# Altium PCB BMS_Slave_R2.PcbDoc
Units mil, origin at the board's own origin, x right, y up, seen from the top; angles counter-clockwise.
Board outline 5120 x 2360 mil, 2 copper layers (Top Layer, Bottom Layer); 120 components, 85 nets, 302 pads, 218 vias.
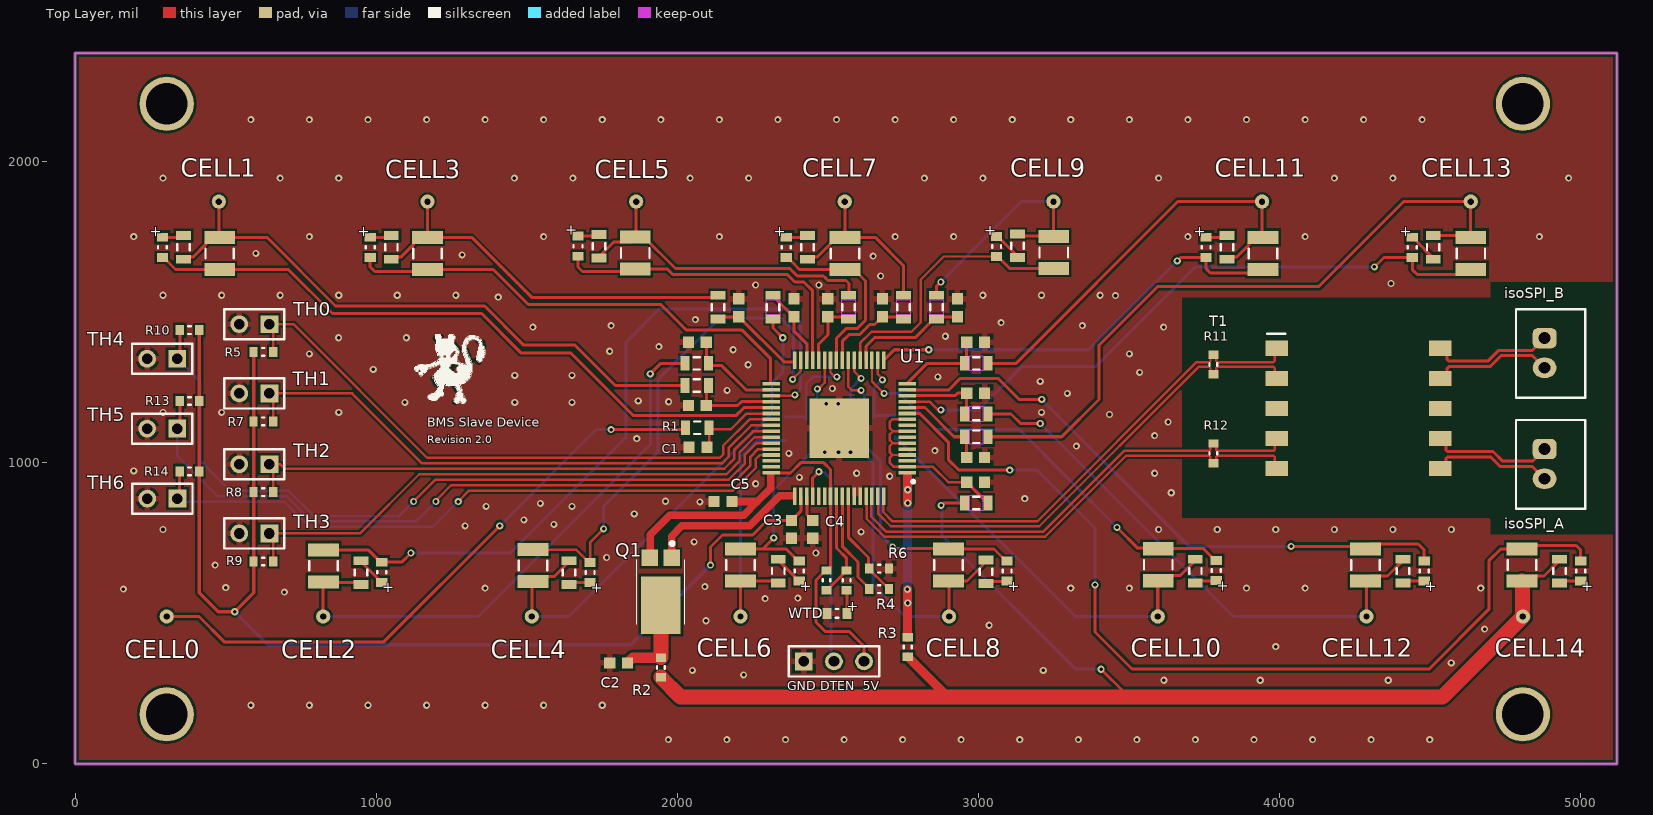
[diagram p0: Top Layer view]
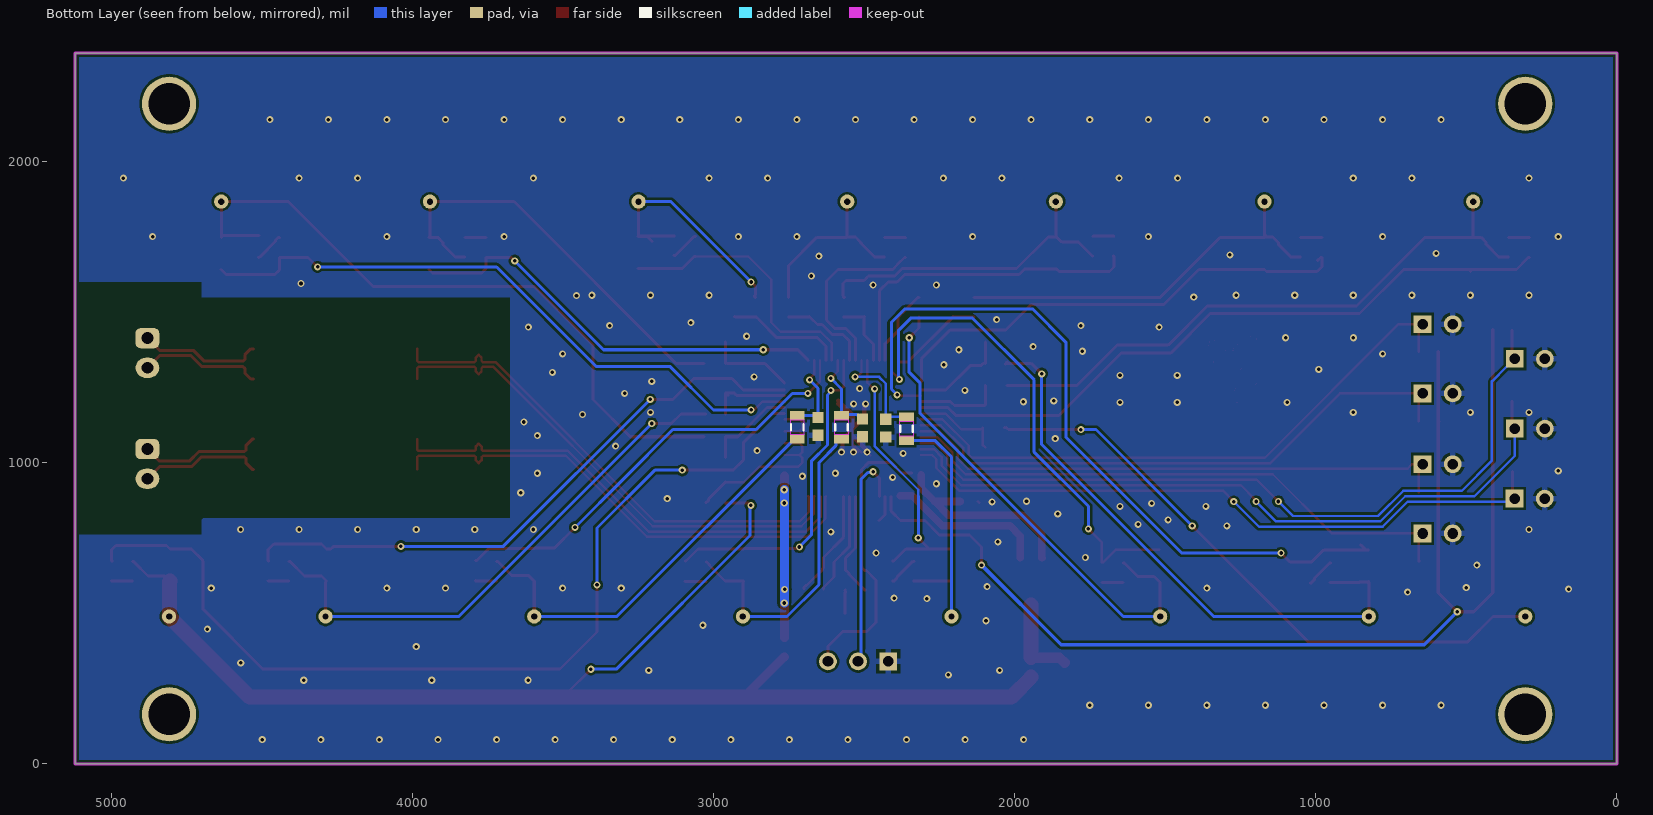
[diagram p1: Bottom Layer view, seen from below]
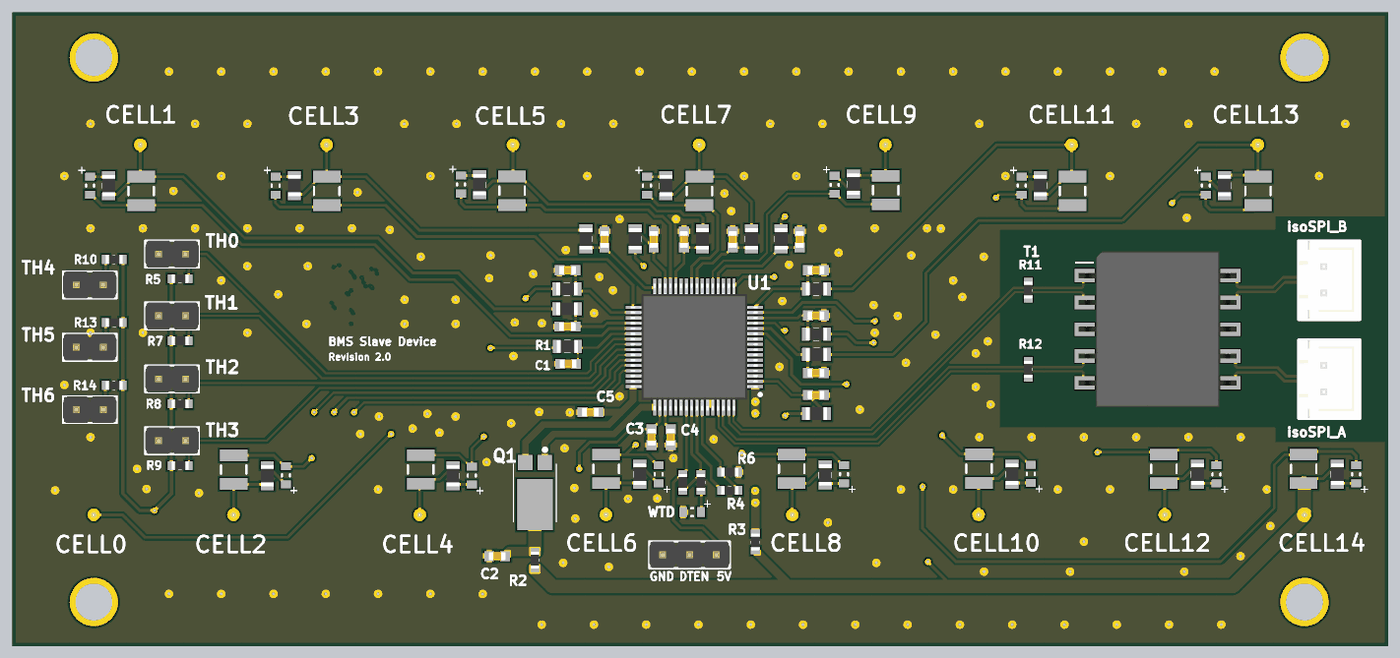
[diagram p2: 3D render of the assembled board from above, using the file's embedded part models]
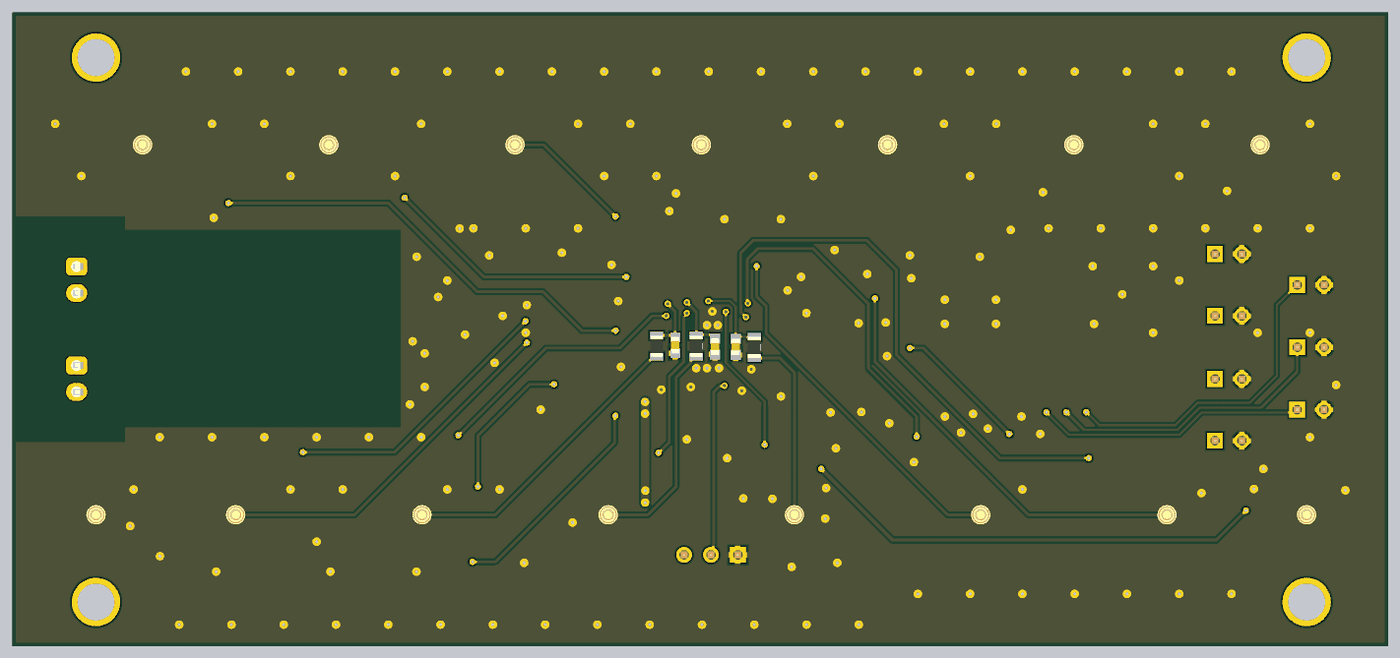
[diagram p3: 3D render of the assembled board from below, using the file's embedded part models]

## Layer stack, top to bottom
Top Solder: solder mask 0.4, Solder Resist, Dk 3.5
Top Layer: signal copper 1.4
Dielectric 1: dielectric 12.6, FR-4, Dk 4.8
Bottom Layer: signal copper 1.4
Bottom Solder: solder mask 0.4, Solder Resist, Dk 3.5

## Board outline
0,0 5120,0 5120,2360 0,2360

## Design rules (kind name [scope] priority, off if disabled: settings)
BoardOutlineClearance [All] p1: gap=7.87 ignorepadtopadclearanceinfootprint=FALSE except(15.75: Arc-SplitBarrior Arc-SplitContinuation Track-SplitBarrior Track-SplitContinuation SMDPad-SplitBarrior SMDPad-SplitContinuation THPad-SplitBarrior THPad-SplitContinuation Via-SplitBarrior Via-SplitContinuation Fill-SplitBarrior Fill-SplitContinuation Poly-SplitBarrior Poly-SplitContinuation Region-SplitBarrior Region-SplitContinuation Text-SplitBarrior Text-SplitContinuation)
Clearance [All] p1: gap=7.87 ignorepadtopadclearanceinfootprint=FALSE except(3.5: Arc-Arc Arc-Track Arc-SMDPad Track-Track Track-SMDPad SMDPad-SMDPad; 5: Arc-Via Track-Via SMDPad-Via THPad-Via Via-Via; 10: Arc-Text Track-Text SMDPad-Text THPad-Text Via-Text Fill-Text Poly-Text Region-Text Text-Text)
DiffPairsRouting [All] p1: maxlimit=10 minlimit=10 mostfreqgap=10 toplayer_minwidth=15 toplayer_maxwidth=15 toplayer_prefwidth=15 bottomlayer_minwidth=15 bottomlayer_maxwidth=15 bottomlayer_prefwidth=15 maxuncoupledlength=500
HoleSize [All] p1: absolutevalues=TRUE maxlimit=248.03 minlimit=7.87 maxpercent=80.000 minpercent=20.000
MinimumAnnularRing [All] p1: minimumring=3
MinimumSolderMaskSliver [All] p1: minsoldermaskwidth=3.94
PlaneConnect [All] p1: planeconnectstyle=Relief reliefexpansion=20 reliefentries=4 reliefconductorwidth=5.1 reliefairgap=10
PolygonConnect PolygonConnect_1 [All] p1: thpad.connectstyle=Relief thpad.reliefconductorwidth=20 thpad.reliefentries=4 thpad.polygonreliefangle="90 Angle" thpad.airgapwidth=10 smdpad.connectstyle=Relief smdpad.reliefconductorwidth=20 smdpad.reliefentries=4 smdpad.polygonreliefangle="90 Angle" smdpad.airgapwidth=10 via.connectstyle=Direct via.reliefconductorwidth=20 via.reliefentries=4 via.polygonreliefangle="90 Angle" via.airgapwidth=10
RoutingCorners [All] p1: cornerstyle=Round minsetback=100 maxsetback=100
RoutingVias [All] p1: holewidth=19.68 width=39.37 viastyle="Through Hole" minholewidth=7.87 minwidth=17.72 maxholewidth=39.37 maxwidth=78.74
SilkToSilkClearance [All] p1: silktosilkclearance=3.94
SilkToSolderMaskClearance [IsPad] p1: minsilkscreentomaskgap=3.94 clearancetoexposedcopper=TRUE
SolderMaskExpansion [All] p1: expansion=4 istentingtop=FALSE
Width [All] p1: maxlimit=100 minlimit=3.5 preferedwidth=15
23 further rules are at their usual default settings.

## Classes and differential pairs
differential pair class ISOSPI_PORTA_N: ISOSPI_PORTA ISOSPI_PORTB ISOSPIA ISOSPIB
channel class "Voltage Sensing": CELL1 CELL2 CELL3 CELL4 CELL5 CELL6 CELL7 CELL8 CELL9 CELL10 CELL11 CELL12 CELL13 CELL14
component class Designator: C2 C3 C4 C5 Q1 R2 R3 R4 R5 R6 R7 R8 R9 R10 R11 R12 R13 R14 U1
component class CELL14: C5_CELL14 D2_CELL14 R15_CELL14 R16_CELL14 R17_CELL14
component class CELL13: C5_CELL13 D2_CELL13 R15_CELL13 R16_CELL13 R17_CELL13
component class CELL12: C5_CELL12 D2_CELL12 R15_CELL12 R16_CELL12 R17_CELL12
component class CELL11: C5_CELL11 D2_CELL11 R15_CELL11 R16_CELL11 R17_CELL11
component class CELL10: C5_CELL10 D2_CELL10 R15_CELL10 R16_CELL10 R17_CELL10
component class CELL9: C5_CELL9 D2_CELL9 R15_CELL9 R16_CELL9 R17_CELL9
component class CELL8: C5_CELL8 D2_CELL8 R15_CELL8 R16_CELL8 R17_CELL8
component class CELL7: C5_CELL7 D2_CELL7 R15_CELL7 R16_CELL7 R17_CELL7
component class CELL6: C5_CELL6 D2_CELL6 R15_CELL6 R16_CELL6 R17_CELL6
component class CELL5: C5_CELL5 D2_CELL5 R15_CELL5 R16_CELL5 R17_CELL5
component class CELL4: C5_CELL4 D2_CELL4 R15_CELL4 R16_CELL4 R17_CELL4
component class CELL3: C5_CELL3 D2_CELL3 R15_CELL3 R16_CELL3 R17_CELL3
component class CELL2: C5_CELL2 D2_CELL2 R15_CELL2 R16_CELL2 R17_CELL2
component class CELL1: C5_CELL1 D2_CELL1 R15_CELL1 R16_CELL1 R17_CELL1
component class BMS_Slave_R2: C1 CELL0 CELL2 CELL3 CELL4 CELL5 CELL6 CELL7 CELL8 CELL9 CELL11 CELL12 CELL13 CELL14 R1
differential pair ISOSPIB: +ISOSPIB_P -ISOSPIB_N
differential pair ISOSPIA: +ISOSPIA_P -ISOSPIA_N
differential pair ISOSPI_PORTB: +ISOSPI_PORTB_P -ISOSPI_PORTB_N
differential pair ISOSPI_PORTA: +ISOSPI_PORTA_P -ISOSPI_PORTA_N

## Components (designator, comment, footprint, x,y, rotation, side; value= is the part's Value field where it differs from the comment)
C1 "Cap" "0603 - Capacitor" 2068.47,1051 r0 top value=10nF
C2 "Cap" "0603 - Capacitor" 1804.53,335 r0 top value=10nF
C3 "Cap" "0603 - Capacitor" 2378.97,778.23 r90 top value=1uF
C4 "Cap" "0603 - Capacitor" 2450,778.23 r90 top value=1uF
C5 "Cap" "0603 - Capacitor" 2990.47,935 r180 top value=10nF
C5 "Cap" "0603 - Capacitor" 2990.47,1017 r180 top value=10nF
C5 "Cap" "0603 - Capacitor" 2990.47,1230.94 r180 top value=10nF
C5 "Cap" "0603 - Capacitor" 2990.53,1400 r180 top value=10nF
C5 "Cap" "0603 - Capacitor" 2652.93,1120.47 r90 bottom value=10nF
C5 "Cap" "0603 - Capacitor" 2930,1514.53 r270 top value=10nF
C5 "Cap" "0603 - Capacitor" 2504.93,1115.47 r90 bottom value=10nF
C5 "Cap" "0603 - Capacitor" 2680.94,1514.53 r270 top value=10nF
C5 "Cap" "0603 - Capacitor" 2428,1114.53 r90 bottom value=10nF
C5 "Cap" "0603 - Capacitor" 2499.28,1514.53 r270 top value=10nF
C5 "Cap" "0603 - Capacitor" 2386.94,1514.53 r270 top value=10nF
C5 "Cap" "0603 - Capacitor" 2203.94,1514.53 r270 top value=10nF
C5 "Cap" "0603 - Capacitor" 2066.53,1400 r0 top value=10nF
C5 "Cap" "0603 - Capacitor" 2066.11,1189.99 r0 top value=10nF
C5 "Cap" "0603 - Capacitor" 2151.53,871 r0 top value=1uF
CELL0 "POGO_PIN" POGO_PIN 304,489 r0 top locked (schematic designator J0)
CELL1 "POGO_PIN" POGO_PIN 477.23,1866.95 r0 top locked (schematic designator J1)
CELL2 "POGO_PIN" POGO_PIN 823.68,489 r0 top locked (schematic designator J2)
CELL3 "POGO_PIN" POGO_PIN 1170.14,1866.95 r0 top locked (schematic designator J3)
CELL4 "POGO_PIN" POGO_PIN 1516.6,489 r0 top locked (schematic designator J4)
CELL5 "POGO_PIN" POGO_PIN 1863.05,1866.95 r0 top locked (schematic designator J5)
CELL6 "POGO_PIN" POGO_PIN 2209.51,489 r0 top locked (schematic designator J6)
CELL7 "POGO_PIN" POGO_PIN 2555.97,1866.95 r0 top locked (schematic designator J7)
CELL8 "POGO_PIN" POGO_PIN 2902.43,489 r0 top locked (schematic designator J8)
CELL9 "POGO_PIN" POGO_PIN 3248.88,1866.95 r0 top locked (schematic designator J9)
CELL10 "POGO_PIN" POGO_PIN 3595.34,489 r0 top locked (schematic designator J10)
CELL11 "POGO_PIN" POGO_PIN 3941.8,1866.95 r0 top locked (schematic designator J11)
CELL12 "POGO_PIN" POGO_PIN 4288.25,489 r0 top locked (schematic designator J12)
CELL13 "POGO_PIN" POGO_PIN 4634.71,1866.95 r0 top locked (schematic designator J13)
CELL14 "POGO_PIN" POGO_PIN 4807.94,489 r0 top locked (schematic designator J14)
D2 "LED2" DIOC1608X06N 290,1715 r270 top locked
D2 "LED2" DIOC1608X06N 5000,640 r90 top
D2 "LED2" DIOC1608X06N 4440.93,1715 r270 top locked
D2 "LED2" DIOC1608X06N 4480,640 r90 top
D2 "LED2" DIOC1608X06N 3755.93,1715 r270 top locked
D2 "LED2" DIOC1608X06N 3790,641.54 r90 top
D2 "LED2" DIOC1608X06N 3060,1718 r270 top locked
D2 "LED2" DIOC1608X06N 3095,640 r90 top
D2 "LED2" DIOC1608X06N 2362,1715 r270 top locked
D2 "LED2" DIOC1608X06N 2405,640 r90 top locked
D2 "LED2" DIOC1608X06N 1670,1719 r270 top locked
D2 "LED2" DIOC1608X06N 1710,635 r90 top locked
D2 "LED2" DIOC1608X06N 980,1715 r270 top locked
D2 "LED2" DIOC1608X06N 1018.4,635.94 r90 top locked
isoSPI_A "1x2 Header" B2B-XH 4880,946.57 r90 top locked (schematic designator J22)
isoSPI_B "1x2 Header" B2B-XH 4880,1315 r90 top locked (schematic designator J23)
J24 "1x3 Header" HDR1X3 2420,340 r0 top
Q1 "DXT5551P5-13" DXT5551P513 1945,570 r180 top
R1 "Res3" "0805 - Resistor"#1 2065.99,1116 r180 top value="10 1/4W"
R2 "Res3" "0603 - Resistor" 1945,320 r90 top value=100
R3 "Res3" "0603 - Resistor" 2765,387.52 r90 top value=0
R4 "Res3" "0603 - Resistor" 2670,580 r180 top value=3k
R5 "Res3" "0603 - Resistor" 625,1368 r180 top value=10k
R6 "Res3" "0603 - Resistor" 2670,648 r180 top value=1k
R7 "Res3" "0603 - Resistor" 625,1137 r180 top value=10k
R8 "Res3" "0603 - Resistor" 625,902 r180 top value=10k
R9 "Res3" "0603 - Resistor" 625,672 r180 top value=10k
R10 "Res3" "0603 - Resistor" 380,1440 r0 top value=10k
R11 "Res3" "0603 - Resistor" 3780,1326 r90 top value=100
R12 "Res3" "0603 - Resistor" 3780,1031 r270 top value=100
R13 "Res3" "0603 - Resistor" 380,1205 r0 top value=10k
R14 "Res3" "0603 - Resistor" 379.52,971 r0 top value=10k
R15 "Res3" "0805 - Resistor"#1 4930,640 r270 top value=220
R15 "Res3" "0805 - Resistor"#1 4510,1715 r270 top value=220
R15 "Res3" "0805 - Resistor"#1 4410,640 r270 top value=220
R15 "Res3" "0805 - Resistor"#1 3825,1715 r90 top value=220
R15 "Res3" "0805 - Resistor"#1 3720,640 r270 top value=220
R15 "Res3" "0805 - Resistor"#1 3130,1720.52 r270 top value=220
R15 "Res3" "0805 - Resistor"#1 3025,637.48 r270 top value=220
R15 "Res3" "0805 - Resistor"#1 2432,1715 r90 top value=220
R15 "Res3" "0805 - Resistor"#1 2335,640 r90 top value=220
R15 "Res3" "0805 - Resistor"#1 1739.36,1719 r90 top value=220
R15 "Res3" "0805 - Resistor"#1 1640,635 r270 top value=220
R15 "Res3" "0805 - Resistor"#1 1050,1715 r90 top value=220
R15 "Res3" "0805 - Resistor"#1 949.33,635 r90 top value=220
R15 "Res3" "0805 - Resistor"#1 359.36,1715 r90 top value=220
R15 "Res3" "0603 - Resistor" 2495,609.25 r270 top value=1M
R16 "Res3" 14-1210 4805,660 r90 top value="15 1/2W"
R16 "Res3" 14-1210 4635,1695 r270 top locked value="15 1/2W"
R16 "Res3" 14-1210 4285,660 r90 top value="15 1/2W"
R16 "Res3" 14-1210 3945,1695 r270 top locked value="15 1/2W"
R16 "Res3" 14-1210 3597,661 r90 top value="15 1/2W"
R16 "Res3" 14-1210 3250,1698 r270 top locked value="15 1/2W"
R16 "Res3" 14-1210 2900,660 r90 top value="15 1/2W"
R16 "Res3" 14-1210 2557,1695 r270 top locked value="15 1/2W"
R16 "Res3" 14-1210 2210,660 r90 top locked value="15 1/2W"
R16 "Res3" 14-1210 1860,1695.85 r270 top locked value="15 1/2W"
R16 "Res3" 14-1210 1520,658.15 r90 top locked value="15 1/2W"
R16 "Res3" 14-1210 1170.64,1695 r270 top locked value="15 1/2W"
R16 "Res3" 14-1210 824.33,657.48 r90 top locked value="15 1/2W"
R16 "Res3" 14-1210 480,1695 r270 top locked value="15 1/2W"
R16 "Res3" "0603 - Resistor" 2562.1,609.25 r270 top value=220
R17 "Res3" "0805 - Resistor"#2 2992.52,865.93 r180 top value="10 1/4W"
R17 "Res3" "0805 - Resistor"#2 2992.52,1086.06 r0 top value="10 1/4W"
R17 "Res3" "0805 - Resistor"#2 2992.52,1161.87 r0 top value="10 1/4W"
R17 "Res3" "0805 - Resistor"#2 2992.57,1330 r0 top value="10 1/4W"
R17 "Res3" "0805 - Resistor"#2 2722,1117.52 r270 bottom value="10 1/4W"
R17 "Res3" "0805 - Resistor"#2 2860.94,1516.57 r90 top value="10 1/4W"
R17 "Res3" "0805 - Resistor"#2 2575,1117.52 r270 bottom value="10 1/4W"
R17 "Res3" "0805 - Resistor"#2 2750.94,1516.57 r90 top value="10 1/4W"
R17 "Res3" "0805 - Resistor"#2 2358.93,1112.52 r270 bottom value="10 1/4W"
R17 "Res3" "0805 - Resistor"#2 2568.34,1516.57 r90 top value="10 1/4W"
R17 "Res3" "0805 - Resistor"#2 2317.87,1516.57 r270 top value="10 1/4W"
R17 "Res3" "0805 - Resistor"#1 2134.87,1516.57 r90 top value="10 1/4W"
R17 "Res3" "0805 - Resistor"#1 2064.48,1330 r180 top value="10 1/4W"
R17 "Res3" "0805 - Resistor"#1 2064.58,1255.94 r180 top value="10 1/4W"
T1 "Comment" HM2100NLT 4261.46,1180 r270 top
TH0 "1x2 Header" HDR1X2 645,1460 r180 top (schematic designator J15)
TH1 "1x2 Header" HDR1X2 645,1230 r180 top (schematic designator J16)
TH2 "1x2 Header" HDR1X2 645,995 r180 top (schematic designator J17)
TH3 "1x2 Header" HDR1X2 645,765 r180 top (schematic designator J18)
TH4 "1x2 Header" HDR1X2 338.94,1345 r180 top (schematic designator J19)
TH5 "1x2 Header" HDR1X2 338.94,1113 r180 top (schematic designator J20)
TH6 "1x2 Header" HDR1X2 339.52,880.52 r180 top (schematic designator J21)
U1 "LTC6813ILWE-1#3ZZPBF" QFP50P1200X1200X120-65N 2537.97,1114.03 r180 top locked
WTD "LED2" DIOC1608X06N 2530,499.17 r180 top (schematic designator D1)

## Footprints (in the part's own frame and the unit in brackets; to place one, negate y for a bottom-side part, rotate by r counter-clockwise, add the part's x,y. Pads: shape width x height; smd on the part's side, far side on the other; paste and mask are expansions set on the pad)
14-1210 [mm] "Chip Resistor, Body 3.2x2.5mm, IPC High Density"
  rect 1.1x2.6 smd: 1(-1.35,0) 2(1.35,0)
  silkscreen extent -0.4,-1.2 0.4,1.2, body extent -1.68,-1.32 1.68,1.32, height 0.9
"0603 - Capacitor" [mm] "0603 Chip Capacitor - IPC Medium Density"
  rect 0.95x0.95 smd: 1(-0.75,0) 2(0.75,0)
  body extent -0.8,-0.4 0.8,0.4, height 0.8
"0603 - Resistor" [mm] "0603 Chip Resistor - IPC Medium Density"
  rect 0.7x0.85 smd: 1(-0.825,0) 2(0.825,0)
  silkscreen extent -0.1,-0.33 0.1,0.33, body extent -0.8,-0.4 0.8,0.4, height 0.45
"0805 - Resistor"#1 [mm] "0805 Chip Resistor - IPC Medium Density"
  rect 0.75x1.25 smd: 1(-1,0) 2(1,0)
  silkscreen extent -0.25,-0.53 0.25,0.53, body extent -1,-0.6 1,0.6, height 0.5
"0805 - Resistor"#2 [mm] "0805 Chip Resistor - IPC Medium Density"
  rect 0.75x1.25 smd: 1(-1,0) 2(1,0)
  Top Layer keep-out region: -0.6,0.6 -0.6,-0.6 0.6,-0.6 0.6,0.6
  silkscreen extent -0.25,-0.53 0.25,0.53, body extent -1,-0.6 1,0.6, height 0.5
B2B-XH [mm] "JST 2-pin Header"
  oval 1.7x2 hole 1: 1(0,0)
  rrect50% 1.7x2 hole 1: 2(2.5,0)
  silkscreen extent -2.54,-3.43 4.95,2.41, body extent -2.45,-3.4 4.95,2.35, height 7
DIOC1608X06N [mm] "Chip Diode, 2-Leads, Body 1.60x0.80mm, IPC Medium Density"
  rect 0.75x0.95 smd: 1(-0.85,0) 2(0.85,0)
  silkscreen extent -0.1,-0.38 0.1,0.38, body extent -0.8,-0.4 0.8,0.4, height 0.6
DXT5551P513 [mm]
  rect 1.39x1.4 smd: 1(-0.92,-2.89) 2(0.92,-2.89)
  rect 3.36x4.86 smd: 3(0,1.092)
  silkscreen extent -2.02,-4.25 2.02,2.73
HDR1X2 [mm] "Connector; Header; 2 Position"
  rect 1.5x1.5 hole 0.9: 1(0,0)
  round 1.5 hole 0.9: 2(2.54,0)
  silkscreen extent -1.27,-1.27 3.81,1.27, body extent -1.27,-1.27 3.81,1.27, height 8.54
HDR1X3 [mm] "Connector; Header; 3 Position"
  rect 1.5x1.5 hole 0.9: 1(0,0)
  round 1.5 hole 0.9: 2(2.54,0) 3(5.08,0)
  silkscreen extent -1.27,-1.27 6.35,1.27, body extent -1.27,-1.27 6.35,1.27, height 8.54
HM2100NLT [mm]
  rect 1.27x1.89 smd: 1(-5.08,-6.895) 2(-2.54,-6.895) 3(0,-6.895) 4(2.54,-6.895) 5(5.08,-6.895) 6(5.08,6.895) 7(2.54,6.895) 8(0,6.895) 9(-2.54,6.895) 10(-5.08,6.895)
  silkscreen extent -6.29,-7.69 -6.29,-6.14, body extent -7.35,-7.48 7.35,7.48, height 3.2
POGO_PIN [mm]
  round 1.2 hole 0.53: 1(0,0)
  body extent -0.91,-0.91 0.91,0.91, height 1.34
QFP50P1200X1200X120-65N [mm]
  rect 1.475x0.3 smd: 1(-5.738,3.75) 2(-5.738,3.25) 3(-5.738,2.75) 4(-5.738,2.25) 5(-5.738,1.75) 6(-5.738,1.25) 7(-5.738,0.75) 8(-5.738,0.25) 9(-5.738,-0.25) 10(-5.738,-0.75) 11(-5.738,-1.25) 12(-5.738,-1.75) 13(-5.738,-2.25) 14(-5.738,-2.75) 15(-5.738,-3.25) 16(-5.738,-3.75) 33(5.738,-3.75) 34(5.738,-3.25) 35(5.738,-2.75) 36(5.738,-2.25) 37(5.738,-1.75) 38(5.738,-1.25) 39(5.738,-0.75) 40(5.738,-0.25) 41(5.738,0.25) 42(5.738,0.75) 43(5.738,1.25) 44(5.738,1.75) 45(5.738,2.25) 46(5.738,2.75) 47(5.738,3.25) 48(5.738,3.75)
  rect 0.3x1.475 smd: 17(-3.75,-5.738) 18(-3.25,-5.738) 19(-2.75,-5.738) 20(-2.25,-5.738) 21(-1.75,-5.738) 22(-1.25,-5.738) 23(-0.75,-5.738) 24(-0.25,-5.738) 25(0.25,-5.738) 26(0.75,-5.738) 27(1.25,-5.738) 28(1.75,-5.738) 29(2.25,-5.738) 30(2.75,-5.738) 31(3.25,-5.738) 32(3.75,-5.738) 49(3.75,5.738) 50(3.25,5.738) 51(2.75,5.738) 52(2.25,5.738) 53(1.75,5.738) 54(1.25,5.738) 55(0.75,5.738) 56(0.25,5.738) 57(-0.25,5.738) 58(-0.75,5.738) 59(-1.25,5.738) 60(-1.75,5.738) 61(-2.25,5.738) 62(-2.75,5.738) 63(-3.25,5.738) 64(-3.75,5.738)
  rect 5x5 smd: 65(0,0)
  silkscreen extent -6.35,4.38 -6.1,4.62, body extent -6,-6 6,6, height 1.2

## Part data
C1 C2 C3 C4 C5 C5 C5 C5 C5 C5 C5 C5 C5 C5 C5 C5 C5 C5 C5: "Capacitor", LatestRevisionDate=17-Jul-2002, LatestRevisionNote="Re-released for DXP Platform.", PackageDescription="Radial Cap, Thru-Hole; 2 Leads; 0.3 in Pin Spacing", PackageReference=RAD-0.3, Published=8-Jun-2000, Publisher="Altium Limited"
CELL0 CELL1 CELL2 CELL3 CELL4 CELL5 CELL6 CELL7 CELL8 CELL9 CELL10 CELL11 CELL12 CELL13 CELL14: "Pogo Pin"
D2 D2 D2 D2 D2 D2 D2 D2 D2 D2 D2 D2 D2 D2 WTD: "Typical RED, GREEN, YELLOW, AMBER GaAs LED", LatestRevisionDate=17-Jul-2002, LatestRevisionNote="Re-released for DXP Platform.", PackageDescription="SM LED; 2 Flat Leads", PackageReference=3.2X1.6X1.1, PackageVersion=Feb-2002, Published=8-Jun-2000, Publisher="Altium Limited"
isoSPI_A isoSPI_B TH0 TH1 TH2 TH3 TH4 TH5 TH6: "1x2 Pin Header"
J24: "1x3 Pin Header"
Q1: "Transistor BJT NPN", Manufacturer_Name="Diodes Inc.", Mouser Part Number=522-DXT5551P5-13, Datasheet Link=https://www.diodes.com/assets/Datasheets/DXT5551P5.pdf, Manufacturer_Part_Number=DXT5551P5-13, Mouser Price/Stock=https://www.mouser.com/Search/Refine.aspx?Keyword=522-DXT5551P5-13
R1 R2 R3 R4 R5 R6 R7 R8 R9 R10 R11 R12 R13 R14 R15 R15 R15 R15 R15 R15 R15 R15 R15 R15 R15 R15 R15 R15 R15 R16 R16 R16 R16 R16 R16 R16 R16 R16 R16 R16 R16 R16 R16 R16 R17 R17 R17 R17 R17 R17 R17 R17 R17 R17 R17 R17 R17 R17: "Resistor", LatestRevisionDate=29-May-2009, LatestRevisionNote="IPC-7351 Footprint Added.", PackageDescription="Chip Resistor", PackageReference=J1-0603, Published=8-Jun-2000, Publisher="Altium Limited"
U1: "Integrated Circuit", Manufacturer_Name="Analog Devices", Mouser Part Number=584-6813ILWE13ZZPBF, Datasheet Link=https://www.analog.com/media/en/technical-documentation/data-sheets/68131f.pdf, Height=1.6mm, Manufacturer_Part_Number=LTC6813ILWE-1#3ZZPBF

## Free pads (board coordinates)
  round 180 hole 137.79: 2(304,2191.75) 2(304,164.2) 2(4807.94,2191.75) 2(4807.94,164.2)

## Via types
v1: diameter 23.62, hole 11.81, Top Layer to Bottom Layer, 218 vias

## Nets (pads, with @x,y where several pads share a name; then routed paths per layer and width w, separated by ;. In a path a pad name is that pad's centre, name@x,y a point inside that pad or via, vN(x,y) a via of type N, cw(c..) or ccw(c..) an arc to the next point about the centre after c; other vN are vias at no path point)
+5: C5.2@2181.06,871 J24.3 Q1.2 R15.1@2495,641.73 U1.48 U1.55 | length 1636.3
  Top Layer w10: U1.48@2340.84,965.49 2375.49,965.49 2410,1000 2486,1000 2508.45,977.55 U1.55 2508.45,655.18 2506.73,653.46 2506.73,650.51 2497.95,641.73 2495,641.73 2492.05,641.73 2460,609.68 2460,470 2490,440 2570,440 2620,390 J24.3
  Top Layer w25: Q1.2 1910,685 1910,760 1975,825 2220,825 2266,871 ; C5.2@2181.06,871 2266,871 ; 2310,960 2310,915 2266,871
GND: C1.1 C2.1 C3.1 C4.1 C5.1 J24.1 R6.1 TH0.2 TH1.2 TH2.2 TH3.2 TH4.2 TH5.2 TH6.2 U1.59 U1.60 U1.65 WTD.2 | length 806.9
  Top Layer w8: C5.1@2117,866 C5.1@2122,871 ; U1.65@2480,1025 v1(2490,1035) U1.65@2537.97,1082.97 ; U1.65@2485,1040 U1.65@2537.97,1092.97 ; U1.65@2505,1147.01 U1.65 ; U1.65@2510,1035 2537.97,1062.97 U1.65@2537.97,1082.97 ; U1.65@2520.19,1035 2537.97,1052.79 U1.65@2537.97,1062.79 ; U1.65@2569.81,1035 2569.81,1043.57 U1.65@2569.81,1082.2 ; U1.65@2574.91,1040.09 U1.65@2580,1035 ; U1.65@2574.91,1077.1 2609.96,1042.05 U1.65@2609.96,1034.96 ; U1.65@2575,1043.57 2575,1077.01 U1.65@2569.81,1082.2 ; U1.65@2537.97,1082.97 U1.65@2537.97,1092.97 ; U1.65@2537.97,1092.97 U1.65 ; U1.65 U1.65@2569.81,1082.2
  Top Layer w15: U1.65@2500,1195 2500,1152.01 U1.65 U1.65@2537.97,1147.97 ; U1.65@2585,1195 2542.97,1152.97 U1.65@2537.97,1147.97 ; U1.65@2585,1205 2580,1200 2537.97,1157.97 U1.65@2537.97,1147.97
  other v1: 1970,80 2164.5,80 2359,80 2553.5,80 2748,80 2942.5,80 3137,80 3331.5,80 3526,80 3720.5,80 3915,80 4109.5,80 4304,80 4498.5,80 583.5,194.5 778,194.5 972.5,194.5 1167,194.5 1361.5,194.5 1556,194.5 1750.5,194.5 3615.82,277.32 3935.82,277.32 4360.82,277.32 2220,295 2050,310 3215,310 4570,335 3987.25,389 4680.82,447.32 3035,460 2095,475 2291.63,548.62 2400,550 695,570 160,580 1361.5,583.5 3306.5,583.5 3501,583.5 3890,583.5 4084.5,583.5 4668,583.5 500,585 2091.63,588.62 465,660 1765,685 2460,700 2055.44,736.94 2610,770 291.75,778 3598.25,778 3792.75,778 3987.25,778 4181.75,778 4376.25,778 4570.75,778 1295,790 1590,795 1490,810 1856.62,829.86 1365,855 1650,855 1545,865 2075,870 1960.62,871.86 3153.64,880.61 3640,900 2260,930 2405.19,950.95 2705,955 2595,965 3585,965 194.5,972.5 2370.19,1030.95 2535,1035 2575,1035 2855,1040 3325,1055 1865,1080 3585,1090 3630,1135 3435,1160 291.75,1167 486.25,1167 875.25,1167 3209.25,1167 2494.88,1195.05 2534.88,1195.05 1095,1200 1460,1200 1650,1200 1970.85,1202.42 1870,1205 3295,1230 2165,1240 2515,1246.3 3205,1270 2865,1285 1460,1290 1650,1290 3535,1300 990,1310 2235,1325 778,1361.5 3501,1361.5 1775,1370 2185,1375 1938.64,1385.61 875,1415 1100,1415 2890,1420 1520,1450 3615,1450 1780,1455 3345,1455 3075,1465 2060,1475 1405,1550 3455,1555 291.75,1556 486.25,1556 680.75,1556 875.25,1556 1069.75,1556 1264.25,1556 3014.75,1556 3209.25,1556 3403.75,1556 2260,1590 2470,1590 4370,1595 2675,1620 2650.19,1685.95 1285,1690 600,1695 194.5,1750.5 778,1750.5 1556,1750.5 2139.5,1750.5 2723,1750.5 2917.5,1750.5 3695.5,1750.5 4084.5,1750.5 4862.5,1750.5 291.75,1945 680.75,1945 875.25,1945 1458.75,1945 1653.25,1945 2042.25,1945 2236.75,1945 2820.25,1945 3014.75,1945 3598.25,1945 4181.75,1945 4376.25,1945 4959.75,1945 583.5,2139.5 778,2139.5 972.5,2139.5 1167,2139.5 1361.5,2139.5 1556,2139.5 1750.5,2139.5 1945,2139.5 2139.5,2139.5 2334,2139.5 2528.5,2139.5 2723,2139.5 2917.5,2139.5 3112,2139.5 3306.5,2139.5 3501,2139.5 3695.5,2139.5 3890,2139.5 4084.5,2139.5 4279,2139.5 4473.5,2139.5
ISOSPI_PORTA_N: R12.2 T1.5 U1.61 | length 1641.8
  Top Layer w8: U1.61 2628.34,886.35 2628.34,820.36 2628.46,820.23 2628.46,813.91 2688.37,754 3221.11,754 3490.11,1023 3765.53,1023 3770.22,1018.31 3770.22,1008.3 R12.2 3789.35,1007.87 3789.35,1018.31 3794.03,1023 3979.83,1023 3984.51,1018.31 T1.5@3984.51,977.98
ISOSPI_PORTA_P: R12.1 T1.4 U1.62 | length 1609.2
  Top Layer w8: U1.62 2644.46,886.35 2644.46,820.54 2695,770 3214.48,770 3483.48,1039 3765.53,1039 3770.22,1043.69 3770.22,1053.7 R12.1 3789.35,1054.13 3789.35,1043.69 3794.03,1039 3979.83,1039 3984.51,1043.69 T1.4@3984.51,1077.97
ISOSPI_PORTB_N: R11.1 T1.2 U1.63 | length 1681.8
  Top Layer w8: U1.63 2667.71,886.35 2667.71,854.12 2667.77,854.06 2667.77,829.6 2708.37,789 3201.63,789 3730.63,1318 3765.97,1318 3770.65,1313.31 3770.65,1302.87 R11.1 3789.35,1302.87 3789.35,1313.31 3794.03,1318 3979.83,1318 3984.51,1313.31 T1.2@3984.51,1277.97
ISOSPI_PORTB_P: R11.2 T1.1 U1.64 | length 1659.2
  Top Layer w8: U1.64 2683.83,886.35 2683.83,854.12 2683.77,854.06 2683.77,836.23 2715,805 3195,805 3724,1334 3765.97,1334 3770.65,1338.69 3770.65,1349.13 R11.2 3789.35,1349.13 3789.35,1338.69 3794.03,1334 3979.83,1334 3984.51,1338.69 T1.1@3984.51,1377.97
ISOSPIA_N: isoSPI_A.1 T1.6 | length 408.4
  Top Layer w10: T1.6@4527.43,977.98 4531.94,977.98 4551.94,997.98 4551.94,1013.12 4557.8,1018.98 4701.42,1018.98 4733.61,986.79 4839.79,986.79 isoSPI_A.1
ISOSPIA_P: isoSPI_A.2 T1.7 | length 408.4
  Top Layer w10: T1.7@4527.43,1077.97 4531.94,1077.97 4551.94,1057.97 4551.94,1042.83 4557.8,1036.97 4708.88,1036.97 4741.06,1004.79 4839.79,1004.79 isoSPI_A.2
ISOSPIB_N: isoSPI_B.1 T1.9 | length 410.1
  Top Layer w10: T1.9@4527.43,1277.97 4536.71,1277.97 4556.71,1297.97 4556.71,1313.12 4562.57,1318.97 4698.69,1318.97 4734.93,1355.21 4839.79,1355.21 isoSPI_B.1
ISOSPIB_P: isoSPI_B.2 T1.10 | length 410.1
  Top Layer w10: T1.10@4527.43,1377.97 4536.71,1377.97 4556.71,1357.97 4556.71,1342.83 4562.57,1336.97 4691.24,1336.97 4727.48,1373.21 4839.79,1373.21 isoSPI_B.2
NetC1_2: C1.2 R1.1 U1.38 | length 296.4
  Top Layer w8: C1.2 2105.36,1058.36 R1.1 R1.1@2105.44,1116.07 ; R1.1@2105.44,1111 2177.87,1111 2229.89,1163.02 2279.55,1163.02 2279.77,1163.24 U1.38
NetC2_2: C2.2 Q1.3 R2.2 | length 292.7
  Top Layer w35: C2.2 1851.54,352.48 R2.2
  Top Layer w50: R2.2 Q1.3
NetC3_2: C3.2 R5.2 R7.2 R8.2 R9.2 R10.2 R13.2 R14.2 U1.50 | length 4100.5
  Top Layer w10: v1(2110,660) 2110,720 2150,760 2250,760 2297.76,807.76 C3.2 2410.02,838.82 U1.50
  Top Layer w12: R10.2@412,1440.48 R10.2 R13.2 412.24,1204.76 412.24,971.24 R14.2 412,568 475,505 v1(530,505) 593,568 593,671.52 R9.2 R8.2 R7.2 ; R7.2@592.28,1136.76 R7.2 ; R5.2 R7.2
  Bottom Layer w12: v1(530,505) 640,395 1845,395 v1(2110,660)
NetC4_2: C4.2 U1.51 | length 88.8
  Top Layer w10: U1.51 2429.71,828.05 C4.2
NetC6_CELL1_2: C5.2@2095.64,1189.99 R17.1@2103.95,1255.94 U1.36 | length 286.7
  Top Layer w10: R17.1@2098,1255 2097.06,1255.94 2097.06,1191.42 2098.49,1189.99 2199.99,1189.99 2212.61,1202.61 U1.36
NetC6_CELL2_2: C5.2@2096.06,1400 R17.1@2103.85,1330 U1.34 | length 315.1
  Top Layer w10: C5.2@2096.06,1400 2096.96,1399.09 R17.1@2096.96,1330 ; R17.1@2103.85,1330 2111.61,1322.24 2147.76,1322.24 2228.02,1241.98 U1.34
NetC6_CELL3_2: C5.2@2203.94,1485 R17.1@2134.87,1477.2 U1.32 | length 312.6
  Top Layer w10: R17.1@2134.87,1484.09 2203.03,1484.09 2203.94,1485 2353.94,1335 U1.32@2385,1335
NetC6_CELL4_2: C5.2@2386.94,1485 R17.1@2317.87,1555.94 U1.30 | length 258.4
  Top Layer w10: R17.1@2317.87,1549.06 2320.82,1549.06 2371.18,1498.7 2373.23,1498.7 2386.94,1485 2386.94,1438.06 2429.71,1395.29 U1.30
NetC6_CELL5_2: C5.2@2499.28,1485 R17.1@2568.34,1477.2 U1.28 | length 226.6
  Top Layer w10: U1.28 2469.08,1394.08 2500,1425 C5.2@2500,1484.28 ; C5.2@2499.28,1485 C5.2@2500,1484.28 ; R17.1@2568.34,1484.09 2500.18,1484.09 C5.2@2500,1484.28
NetC6_CELL6_2: C5.2@2428,1144.06 R17.1@2358.93,1151.89 U1.26 | length 370.7
  Top Layer w8: U1.26 2508.45,1298.9 2519.36,1287.99 2527.01,1287.99 v1(2530,1285)
  Bottom Layer w8: R17.1@2358.93,1151.89 2420.17,1151.89 2428,1144.06 2428,1263 2450,1285 v1(2530,1285)
NetC6_CELL7_2: C5.2@2680.94,1485 R17.1@2750.94,1477.2 U1.24 | length 300.4
  Top Layer w10: U1.24 2547.82,1402.82 2570,1425 2605.01,1425 2639.01,1459 2654.93,1459 2680.94,1485 2681.84,1484.09 R17.1@2750.94,1484.09
NetC6_CELL8_2: C5.2@2504.93,1145 R17.1@2575,1156.89 U1.22 | length 284.6
  Top Layer w8: U1.22 2587.19,1302.81 v1(2610,1280)
  Bottom Layer w10: C5.2@2504.93,1145 2518.64,1158.7 2523.19,1158.7 2524.49,1160 2571.89,1160 2575,1156.89 2575,1245 v1(2610,1280)
NetC6_CELL9_2: C5.2@2930,1485 R17.1@2860.94,1477.2 U1.20 | length 391.5
  Top Layer w10: U1.20 2626.56,1386.56 2655,1415 2790,1415 2849.2,1474.2 2849.2,1475.31 2857.98,1484.09 2929.09,1484.09 C5.2@2930,1485
NetC6_CELL10_2: C5.2@2652.93,1150 R17.1@2722,1156.89 U1.18 | length 279.7
  Top Layer w8: U1.18 2665.93,1293.6 2681,1278.53 v1(2681,1275)
  Bottom Layer w10: v1(2681,1275) 2652.93,1246.93 2652.93,1150 2659.82,1156.89 R17.1@2722,1156.89
NetC6_CELL11_2: C5.2@2961,1400 R17.1@2953.2,1330 U1.16 | length 285.5
  Top Layer w10: U1.16@2765,1265 2830,1330 R17.1@2953.2,1330 ; R17.1@2960.09,1330 2960.09,1399.09 C5.2@2961,1400
NetC6_CELL12_2: C5.2@2960.94,1230.94 R17.1@2953.15,1161.87 U1.14 | length 281
  Top Layer w10: U1.14 2922.3,1222.3 2930.94,1230.94 2960.94,1230.94 C5.2@2960.04,1230.03 ; C5.2@2952.31,1222.3 C5.2@2960.04,1230.03 ; R17.1@2960.04,1161.87 C5.2@2960.04,1230.03
NetC6_CELL13_2: C5.2@2960.94,1017 R17.1@2953.15,1086.06 U1.12 | length 305.7
  Top Layer w10: U1.12 2822.07,1182.93 2918.94,1086.06 2960.04,1086.06 2960.04,1017.91 C5.2@2960.94,1017
NetC6_CELL14_2: C5.2@2960.94,935 R17.1@3031.89,865.93 U1.2 U1.4 U1.6 U1.8 U1.10 | length 750.2
  Top Layer w8: U1.4 2714.55,1025.45 ; U1.6 2715.18,1064.82 ; U1.8 2715.81,1104.19 ; U1.10 2713.56,1143.56 2705,1135 2705,1115 2715.81,1104.19 ; C5.2@2960.94,935 2900,935 2848.92,986.08 U1.2 2718.92,986.08 2705,1000 2705,1015.9 2714.55,1025.45 ; 2714.55,1025.45 2705,1035 2705,1054.64 2715.18,1064.82 ; 2715.18,1064.82 2705,1075 2705,1093.38 2715.81,1104.19
  Top Layer w10: C5.2@2960.94,935 3016.22,879.72 3016.22,874.71 3025,865.93 R17.1@3025,868.89
NetD1_1: R16.2@2562.1,576.77 WTD.1 | length 75.1
  Top Layer w10: R16.2@2560,570 2561.46,570 2563.46,567.99 WTD.1 ; R16.2@2562.1,576.77 R16.2@2563.46,575.4
NetD2_CELL1_1: D2.1@290,1748.46 R15.2@359.36,1754.37 | length 69.8
  Top Layer w10: D2.1@290,1748.46 290.49,1747.97 358.87,1747.97 R15.2@359.36,1747.48
NetD2_CELL1_2: D2.2@290,1681.54 R16.2@480,1641.85 U1.37 | length 2260
  Top Layer w10: D2.2@290,1681.54 293.94,1681.54 333.62,1641.85 R16.2@480,1641.85 ; R16.2@486.54,1635.31 R16.2@480,1641.85 ; 2222.93,1182.61 2220.9,1182.61 2194.28,1156 1854,1156 1645,1365 1480,1365 1350,1495 855,1495 708.15,1641.85 R16.2@480,1641.85 ; 2222.93,1182.93 U1.37
NetD2_CELL2_1: D2.1@1018.4,602.48 R15.2@949.33,674.37 | length 99.2
  Top Layer w10: R15.2@949.33,667.48 952.28,667.48 1004.7,615.07 1004.7,610.71 1014.46,600.94 D2.1@1018.4,600.94
NetD2_CELL2_2: D2.2@1018.4,669.41 R16.2@824.33,710.63 U1.35 | length 2505.4
  Top Layer w8: U1.35 2387.3,1222.3 v1(2390,1225)
  Top Layer w10: R16.2@824.33,710.63 R16.2@834.21,710.63 ; R16.2@850.87,727.28 R16.2@834.21,710.63 ; v1(1115,700) 1084.41,669.41 1018.4,669.41 1014.46,669.41 973.24,710.63 R16.2@834.21,710.63
  Bottom Layer w10: v1(1115,700) 1445,700 1830,1085 1830,1400 1941,1511 2364,1511 2409.57,1465.43 2409.57,1271.44 2409,1270.87 2409,1244 v1(2390,1225)
NetD2_CELL3_1: D2.1@980,1748.46 R15.2@1050,1754.37 | length 70.4
  Top Layer w10: D2.1@980,1748.46 980.49,1747.97 1049.51,1747.97 R15.2@1050,1747.48
NetD2_CELL3_2: D2.2@980,1681.54 R16.2@1170.64,1641.85 U1.33 | length 1586.3
  Top Layer w10: D2.2@993.7,1671.77 983.94,1681.54 980,1681.54 980,1650 995,1635 1163.79,1635 1170.64,1641.85 1388.15,1641.85 1505,1525 1945,1525 2030,1440 2215,1440 2310,1345 2310,1270
NetD2_CELL4_1: D2.1@1710,601.54 R15.2@1640,595.63 | length 70.4
  Top Layer w10: R15.2@1640,602.52 1640.49,602.03 1709.51,602.03 D2.1@1710,601.54
NetD2_CELL4_2: D2.2@1710,668.46 R16.2@1520,711.3 U1.31 | length 1698.4
  Top Layer w8: R16.2@1520,711.3 1663.23,711.3 1706.06,668.46 1710,668.46 1710,735 v1(1755,780) ; v1(2382.76,1276.37) 2382.76,1277.76 2410.02,1305.02 U1.31
  Bottom Layer w10: v1(1755,780) 1755,855 1935,1035 1935,1275 2140,1480 2345,1480 2385,1440 2385,1278.61 v1(2382.76,1276.37)
NetD2_CELL5_1: D2.1@1670,1752.46 R15.2@1739.36,1758.37 | length 69.8
  Top Layer w10: D2.1@1670,1752.46 1670.49,1751.97 1738.87,1751.97 R15.2@1739.36,1751.48
NetD2_CELL5_2: D2.2@1670,1685.54 R16.2@1860,1642.7 U1.29 | length 1088.8
  Top Layer w10: D2.2@1673.94,1685.54 1670,1685.54 1670,1650 1685,1635 1852.3,1635 1860,1642.7 1967.3,1642.7 1985,1625 2365,1625 2390,1600 2420,1600 2449.39,1570.61 U1.29
NetD2_CELL6_1: D2.1@2405,606.54 R15.2@2335,679.37 | length 100.4
  Top Layer w10: R15.2@2334.51,672.97 2335,672.48 2337.95,672.48 2391.3,619.13 2391.3,616.3 2401.06,606.54 2405,606.54 D2.1@2404.51,607.03
NetD2_CELL6_2: D2.2@2405,673.46 R16.2@2210,713.15 U1.27 | length 926.3
  Top Layer w8: v1(2465,1245) 2468.3,1245 2488.76,1265.46 U1.27
  Top Layer w10: R16.2@2210,713.15 2283.15,713.15 ; v1@2320,749.06 v1(2320,750) 2283.15,713.15 ; D2.2@2405,673.46 2401.06,673.46 2361.38,713.15 2283.15,713.15
  Bottom Layer w8: 2320,890 2320,910 2465,1055 v1(2465,1245)
  Bottom Layer w10: v1(2320,750) 2320,890
NetD2_CELL7_1: D2.1@2362,1748.46 R15.2@2432,1754.37 | length 70.4
  Top Layer w10: D2.1@2362,1748.46 2362.49,1747.97 2431.51,1747.97 R15.2@2432,1747.48
NetD2_CELL7_2: D2.2@2362,1681.54 R16.2@2557,1641.85 U1.25 | length 620.7
  Top Layer w10: D2.2@2362,1681.54 2365.94,1681.54 2390.45,1657.02 2390.45,1656.6 2405.2,1641.85 2557,1641.85 2586.53,1641.85 2625,1603.38 2625,1473.28 2596.72,1445 2560,1445 2528.13,1413.13 U1.25
NetD2_CELL8_1: D2.1@3095,606.54 R15.2@3025,598.11 | length 70.6
  Top Layer w10: R15.2@3025,605 3025.77,605.77 3094.23,605.77 D2.1@3095,606.54
NetD2_CELL8_2: D2.2@3095,673.46 R16.2@2900,713.15 U1.23 | length 1097.9
  Top Layer w8: U1.23 2567.5,1252.5 2580,1240 v1(2610,1240)
  Top Layer w10: v1(2715,720) 2718.69,720 2723.69,715 2898.15,715 2900,713.15 3051.38,713.15 3091.06,673.46 D2.2@3095,673.46
  Bottom Layer w10: v1(2610,1240) 2610,1236.31 2621.23,1225.08 2621.23,1058.77 2675,1005 2675,760 v1(2715,720)
NetD2_CELL9_1: D2.1@3060,1751.46 R15.2@3130,1681.15 | length 98.6
  Top Layer w10: D2.1@3060.77,1752.23 3060,1751.46 3063.94,1751.46 3073.7,1741.7 3073.7,1741.39 3127.05,1688.04 3130,1688.04 R15.2@3130.77,1688.81
NetD2_CELL9_2: D2.2@3060,1684.54 R16.2@3250,1644.85 U1.21 | length 918.8
  Top Layer w8: U1.21 2606.87,1396.87 2645,1435 2777,1435 2808,1466 2808,1608 2884.54,1684.54 D2.2@3060,1684.54
  Top Layer w10: D2.2@3060,1684.54 3063.94,1684.54 3103.62,1644.85 R16.2@3250,1644.85
NetD2_CELL10_1: D2.1@3790,608.07 R15.2@3720,600.63 | length 70.2
  Top Layer w10: R15.2@3720,607.52 3720.28,607.8 3789.72,607.8 D2.1@3790,608.07
NetD2_CELL10_2: D2.2@3790,675 R16.2@3597,714.15 U1.19 | length 1460.5
  Top Layer w8: U1.19 2646.24,1269.41 2685.81,1229.85 v1(2686.35,1229.85)
  Top Layer w10: v1(3460,785) 3528.91,716.09 3595.06,716.09 3597,714.15 3746.91,714.15 3786.06,675 D2.2@3790,675
  Bottom Layer w10: v1(2686.35,1229.85) 2738.28,1229.85 2858.13,1110 3135,1110 3300.08,944.92 v1(3460,785)
NetD2_CELL11_1: D2.1@3755.93,1748.46 R15.2@3825,1754.37 | length 69.5
  Top Layer w10: D2.1@3755.93,1748.46 3756.43,1747.97 3824.51,1747.97 R15.2@3825,1747.48
NetD2_CELL11_2: D2.2@3755.93,1681.54 R16.2@3945,1641.85 U1.17 | length 1449.1
  Top Layer w10: U1.17 2720.68,1375 v1(2835,1375) ; v1(3660,1670) 3671.54,1681.54 3755.93,1681.54 3755.93,1644.07 3770,1630 3933.15,1630 R16.2@3945,1641.85
  Bottom Layer w10: v1(2835,1375) 3365,1375 v1(3660,1670)
NetD2_CELL12_1: D2.1@4480,606.54 R15.2@4410,600.63 | length 70.4
  Top Layer w10: R15.2@4410,607.52 4410.49,607.03 4479.51,607.03 D2.1@4480,606.54
NetD2_CELL12_2: D2.2@4480,673.46 R16.2@4285,713.15 U1.15 | length 2023.9
  Top Layer w10: U1.15 2901.98,1241.98 ; 2901.98,1242.3 2939.69,1280 3065,1280 3135,1210 v1(3210,1210) ; v1(4038.13,721.96) 4261.42,721.96 4270.24,713.15 4285,713.15 4301.65,729.8 4444.8,729.8 4445,730 4460,730 4480,710 4480,677.4 4476.06,673.46 D2.2@4480,673.46
  Bottom Layer w10: v1(3210,1210) 3698.04,721.96 v1(4038.13,721.96)
NetD2_CELL13_1: D2.1@4440.93,1748.46 R15.2@4510,1675.63 | length 100
  Top Layer w10: D2.1@4441.43,1747.97 4440.93,1748.46 4444.87,1748.46 4454.64,1738.7 4454.64,1734.93 4507.05,1682.52 4510,1682.52 R15.2@4510.49,1682.03
NetD2_CELL13_2: D2.2@4440.93,1681.54 R16.2@4635,1641.85 U1.13 | length 2136.6
  Top Layer w8: U1.13 2837.39,1202.61 v1@2865,1175
  Top Layer w10: v1(4315,1650) 4346.54,1681.54 4440.93,1681.54 4440.93,1640.93 4456.87,1625 4500,1625 4500.2,1625.2 4618.35,1625.2 R16.2@4635,1641.85
  Bottom Layer w10: v1(2875,1175) 3000,1175 3145,1320 3390,1320 3720,1650 v1(4315,1650)
NetD2_CELL14_1: D2.1@5000,606.54 R15.2@4930,600.63 | length 70.4
  Top Layer w10: R15.2@4930,607.52 4930.49,607.03 4999.51,607.03 D2.1@5000,606.54
NetD2_CELL14_2: D2.2@5000,673.46 R16.2@4805,713.15 U1.11 | length 3134.4
  Top Layer w10: U1.11 2804.89,1163.24 2900,1068.13 2900,1010 2935,975 v1(3104,975) ; v1(3387,594) 3387,438 3510,315 4497,315 4695,513 4695,674 4734.15,713.15 4805,713.15 4816.85,725 4985,725 5000,710 5000,673.46 D2.2@4996.06,673.46
  Bottom Layer w10: v1(3104,975) 3195,975 3387,783 v1(3387,594)
NetJ0_1: CELL0.1 R1.2 | length 2053.2
  Top Layer w10: CELL0.1 411,489 495,405 1025,405 v1(1410,790) ; v1(1780,1110) 2020.62,1110 R1.2 ; R1.2@2032.59,1115.07 R1.2@2033.51,1116
  Bottom Layer w10: v1(1410,790) 1730,1110 v1(1780,1110)
NetJ1_1: CELL1.1 R15.1@359.36,1675.63 R16.1@480,1748.15 R17.2@2025.21,1255.94 | length 2020.5
  Top Layer w10: R15.1@359.36,1682.52 391.09,1682.52 433.82,1725.25 433.82,1731.5 450.47,1748.15 R16.1@480,1748.15 ; CELL1.1 477.23,1750.92 R16.1@480,1748.15 ; R17.2@2025.21,1255.94 1794.06,1255.94 1660,1390 1490,1390 1360,1520 865,1520 636.85,1748.15 R16.1@480,1748.15
NetJ2_1: CELL2.1 R15.1@949.33,595.63 R16.1@824.33,604.33 R17.2@2025.11,1330 | length 1948.4
  Top Layer w10: CELL2.1 823.68,603.68 R16.1@824.33,604.33 ; R16.1@825,605 R16.1@824.33,604.33 ; R16.1@828.02,600.65 R16.1@824.33,604.33 ; R16.1@853.86,602.52 R15.1@952.28,602.52 ; R16.1@853.86,604.33 R16.1@824.33,604.33 ; v1(1910,1295) 1945,1330 R17.2@2025.11,1330 ; R17.2@2024.05,1335 R17.2@2032,1327.05
  Bottom Layer w10: CELL2.1 1339,489 1910,1060 v1(1910,1295)
NetJ3_1: CELL3.1 R15.1@1050,1675.63 R16.1@1170.64,1748.15 R17.2@2134.87,1555.94 | length 1314.9
  Top Layer w10: R15.1@1050,1682.52 1081.73,1682.52 1124.46,1725.25 1124.46,1731.5 1141.61,1748.65 R16.1@1165.14,1748.65 ; R16.1@1165.14,1753.65 R16.1@1170.64,1748.15 ; R16.1@1169.97,1747.48 R16.1@1170.64,1748.15 ; R16.1@1170.14,1753.65 CELL3.1 ; R17.2@2134.87,1549.06 1515.94,1549.06 1316.85,1748.15 R16.1@1170.64,1748.15
NetJ4_1: CELL4.1 R15.1@1640,674.37 R16.1@1520,605 R17.2@2317.87,1477.2 | length 1688.6
  Top Layer w10: CELL4.1 1516.6,601.6 1520,605 1536.65,621.65 1591.22,621.65 1637.05,667.48 R15.1@1640,667.48 ; R17.2@2317.87,1484.09 2317.87,1447.13 v1(2350,1415)
  Bottom Layer w10: CELL4.1 1639,489 2315,1165 2315,1265 2350,1300 v1(2350,1415)
NetJ5_1: CELL5.1 R15.1@1739.36,1679.63 R16.1@1860,1749 R17.2@2568.34,1555.94 | length 1090.4
  Top Layer w10: R15.1@1739.36,1686.52 1742.31,1686.52 1788.14,1732.35 1843.35,1732.35 R16.1@1860,1749 ; CELL5.1 1863.05,1752.05 R16.1@1860,1749 ; R17.2@2568.34,1549.06 2565.39,1549.06 2570,1553.67 2570,1595 2560,1605 2499.8,1605 2490.82,1613.98 2490.82,1614.18 2485,1620 2398.28,1620 2373.28,1645 1993.53,1645 1889.53,1749 R16.1@1860,1749
NetJ6_1: CELL6.1 R15.1@2335,600.63 R16.1@2210,606.85 R17.2@2358.93,1073.15 | length 945.5
  Top Layer w10: CELL6.1 2209.51,606.36 2210,606.85 2210.67,607.52 R15.1@2335,607.52
  Bottom Layer w10: CELL6.1 2209.51,1019.51 2263.15,1073.15 R17.2@2358.93,1073.15
NetJ7_1: CELL7.1 R15.1@2432,1675.63 R16.1@2557,1748.15 R17.2@2750.94,1555.94 | length 608.4
  Top Layer w10: R15.1@2432,1682.52 2463.73,1682.52 2510.82,1729.61 2510.82,1731.5 2528.5,1749.18 2555.97,1749.18 CELL7.1 ; R16.1@2557,1748.15 2656.85,1748.15 2750.94,1654.06 R17.2@2750.94,1549.06
NetJ8_1: CELL8.1 R15.1@3025,676.85 R16.1@2900,606.85 R17.2@2575,1078.15 | length 1087.5
  Top Layer w10: CELL8.1 2902.43,604.43 2900,606.85 2961.89,606.85 3013.27,658.23 3013.27,661.18 3022.05,669.96 R15.1@3025,669.96
  Bottom Layer w10: R17.2@2575,1078.15 2583.95,1078.15 2593.72,1068.39 2593.72,1056.28 2650,1000 2650,595 2756,489 CELL8.1
NetJ9_1: CELL9.1 R15.1@3130,1759.89 R16.1@3250,1751.15 R17.2@2860.94,1555.94 | length 835.4
  Top Layer w10: R17.2@2860,1549.99 2860.94,1549.06 2865,1553.12 2864.71,1553.12 2860,1557.83 2860,1585 v1(2875,1600) ; R15.1@3130,1753 3248.15,1753 R16.1@3248.88,1752.27 ; R16.1@3203.82,1734.5 3220.47,1751.15 3250,1751.15 R16.1@3248.88,1752.27 ; CELL9.1 R16.1@3248.88,1752.27
  Bottom Layer w10: v1(2875,1600) 3141.95,1866.95 CELL9.1
NetJ10_1: CELL10.1 R15.1@3720,679.37 R16.1@3597,607.85 R17.2@2722,1078.15 | length 1389.6
  Top Layer w10: CELL10.1 3595.34,606.19 3597,607.85 3613.65,624.5 3669.07,624.5 3717.05,672.48 R15.1@3720,672.48
  Bottom Layer w10: R17.2@2722,1078.15 2731.84,1078.15 3320.99,489 CELL10.1 ; R17.2@2722,1085.04 R17.2@2724.95,1085.04
NetJ11_1: CELL11.1 R15.1@3825,1675.63 R16.1@3945,1748.15 R17.2@3031.94,1330 | length 1403.6
  Top Layer w10: R17.2@3031.94,1330 3125,1330 3661.95,1866.95 CELL11.1 3941.8,1751.35 3945,1748.15 3915.47,1748.15 3898.82,1731.5 3898.82,1724.61 3856.73,1682.52 R15.1@3825,1682.52
NetJ12_1: CELL12.1 R15.1@4410,679.37 R16.1@4285,606.85 R17.2@3031.89,1161.87 | length 1813.3
  Top Layer w10: R17.2@3025,1161.87 3108.13,1161.87 3140,1130 v1(3205,1130) ; CELL12.1 4288.25,603.6 4285,606.85 4301.65,623.5 4358.07,623.5 4407.05,672.48 R15.1@4410,672.48
  Bottom Layer w10: v1(3205,1130) 3846,489 CELL12.1
NetJ13_1: CELL13.1 R15.1@4510,1754.37 R16.1@4635,1748.15 R17.2@3031.89,1086.06 | length 2277.4
  Top Layer w10: R17.2@3031.89,1086.06 3276.06,1086.06 3400,1210 3400,1390 3595,1585 4130,1585 4411.95,1866.95 CELL13.1 4634.71,1748.44 4628.78,1754.37 R15.1@4510,1754.37
NetJ14_1: CELL14.1 R2.1 R3.1 R15.1@4930,679.37 R16.1@4805,606.85 R17.2@2953.15,865.93 | length 4472.3
  Top Layer w10: R3.1 R3.1@2767.95,355.04 ; v1(2876,858) 2883.93,865.93 2960.04,865.93 R17.2@2959.1,865 ; v1(3407,314) 3483,238 ; R16.1@4805,606.85 4821.65,623.5 4878.07,623.5 4927.05,672.48 R15.1@4930,672.48
  Top Layer w30: R3.1 2898.04,222
  Top Layer w50: R2.1 2010.52,222 2898.04,222 4540.94,222 CELL14.1 4806.47,490.47 4806.47,605.38 R16.1@4805,606.85
  Bottom Layer w10: v1(2876,858) 2878.61,855.39 2878.61,758.39 3323,314 v1(3407,314)
NetJ15_1: R5.1 TH0.1 U1.39 | length 2018.3
  Top Layer w8: R5.1 657.48,1447.52 TH0.1 725,1460 1169.3,1015.7 2140.7,1015.7 2152.32,1027.32 2152.32,1056.47 2239.41,1143.56 U1.39
NetJ16_1: R7.1 TH1.1 U1.40 | length 1930.8
  Top Layer w8: R7.1 657.48,1217.52 TH1.1 920,1230 1152.3,997.7 2134.77,997.7 2148.16,997.7 2170.32,1019.87 2170.32,1033.25 2170.32,1049.02 2245.18,1123.87 U1.40
NetJ17_1: R8.1 TH2.1 U1.41 | length 1844.2
  Top Layer w8: R8.1 TH2.1@657.48,982.52 ; TH2.1@660.3,979.7 TH2.1@657.48,982.52 ; U1.41 2287.25,1104.19 2287.03,1103.97 2250.73,1103.97 2188.32,1041.56 2188.32,1012.41 2155.61,979.7 1050.3,979.7 1050,980 695,980 680,995 TH2.1 TH2.1@657.48,982.52
NetJ18_1: R9.1 TH3.1 U1.42 | length 1918
  Top Layer w8: R9.1 658,672.52 658,752 TH3.1 946,765 1142.7,961.7 2149.68,961.7 2163.07,961.7 2206.32,1004.96 2206.32,1018.34 2206.32,1034.1 2256.5,1084.28 2287.03,1084.28 2287.25,1084.5 U1.42
  Top Layer w10: R9.1 R9.1@657.48,674.95
NetJ19_1: R10.1 TH4.1 U1.43 | length 2572.8
  Top Layer w8: v1(1124,871) 1196.7,943.7 2157.14,943.7 2170.52,943.7 2224.32,997.5 2224.32,1010.89 2224.32,1026.65 2262.49,1064.82 U1.43
  Top Layer w10: R10.1 347.52,1353.58 TH4.1 TH4.1@348.42,1335.52
  Bottom Layer w8: TH4.1 364.46,1319.47 365.53,1319.47 415,1270 415,1006.69 515.34,906.34 709.57,906.34 792.91,823 1076,823 v1(1124,871)
NetJ20_1: R13.1 TH5.1 U1.44 | length 2368.2
  Top Layer w8: v1(1198,871) 1198,874.59 1248.41,925 2177.28,925 2242.32,990.04 2242.32,1019.19 2268.26,1045.13 U1.44
  Top Layer w10: TH5.1 347.52,1121.58 R13.1
  Bottom Layer w8: TH5.1 338.94,1022.06 472.66,888.34 702.66,888.34 786,805 1132,805 v1(1198,871)
NetJ21_1: R14.1 TH6.1 U1.45 | length 2220.7
  Top Layer w8: v1(1272.23,870.77) 1308.46,907 2184.73,907 2260.32,982.59 2260.32,1011.74 2274.03,1025.45 U1.45
  Top Layer w10: TH6.1 347.04,888.04 R14.1
  Bottom Layer w8: TH6.1 350.04,870 695,870 778,787 1188.46,787 v1(1272.23,870.77)
NetJ24_2: J24.2 U1.52 | length 749.9
  Top Layer w10: U1.52 2449.39,949.39 v1(2470,970)
  Bottom Layer w10: v1(2470,970) 2472.61,967.39 2487.61,967.39 2510,945 2510,380 2510.61,379.39 2510.61,349.39 J24.2
NetQ1_1: Q1.1 U1.49 | length 526.6
  Top Layer w25: Q1.1 1981.22,756.22 2015,790 2240,790 2340,890 2380,890
NetR3_2: R3.2 U1.1 | length 625.9
  Top Layer w30: 2763.88,955.17 2765,954.05 v1(2765,866) ; v1(2764,579) 2765,578 R3.2
  Bottom Layer w30: v1(2765,534) 2765,578 v1(2764,579) 2765,580 v1(2765,910.03)
NetR4_1: R4.1 R6.2 U1.58 | length 361.6
  Top Layer w10: U1.58 2567.5,752.5 2635,685 R6.2@2635,650 ; R6.2 2637.52,645.05 2690.83,591.73 2693.7,591.73 2700,585.43 R4.1@2700,580
NetR4_2: R4.2 U1.57 | length 344.2
  Top Layer w10: U1.57 2547.82,722.18 2600,670 2600,620.47 2635,585.47 R4.2@2635,580
NetR15_2: R15.2@2495,576.77 R16.1@2562.1,641.73 U1.56 | length 356.7
  Top Layer w10: R15.2@2495,576.77 2497.95,576.77 2550.36,629.18 2550.36,632.95 2559.14,641.73 2562.1,641.73 2562.1,682.45 2528.13,716.41 U1.56
pads on no net: T1.3 T1.8 U1.3 U1.5 U1.7 U1.9 U1.46 U1.47 U1.53 U1.54

## Polygon pours and split planes (outlines as drawn)
GND on Bottom Layer "GND_L02_P000" (solid, pour order 0): 0,2360 5120,2360 5120,0 0,0
GND on Top Layer "GND_L01_P001" (solid, pour order 1): 0,0 0,2360 5120,2360 5120,0

## Keep-outs
Keep-Out Layer:
  the board outline again, w10

## Other copper
Top Layer:
  region: 1274.53,1372.88 1275.1,1372.88 1275.1,1372.31 1274.53,1372.31 1274.53,1372.88 1273.96,1372.88 1273.96,1373.45 1274.53,1373.45
  region: 1246.01,1313.56 1246.58,1313.56 1246.58,1312.99 1247.15,1312.99 1247.15,1312.42 1246.58,1312.42 1246.58,1312.99 1246.01,1312.99 1246.01,1313.56 1245.44,1313.56 1245.44,1314.13 1246.01,1314.13
  region: 1199.23,1259.94 1199.8,1259.94 1199.8,1259.37 1200.37,1259.37 1200.37,1258.8 1199.8,1258.8 1199.8,1259.37 1199.23,1259.37 1199.23,1259.94 1198.66,1259.94 1198.66,1260.51 1199.23,1260.51
  region: 1249.43,1310.13 1250,1310.13 1250,1309.56 1250.57,1309.56 1250.57,1308.99 1250,1308.99 1250,1309.56 1249.43,1309.56 1249.43,1310.13 1248.86,1310.13 1248.86,1310.7 1249.43,1310.7
  region: 1332.71,1340.94 1333.28,1340.94 1333.28,1340.37 1333.85,1340.37 1333.85,1339.8 1333.28,1339.8 1333.28,1340.37 1332.71,1340.37 1332.71,1340.94 1332.14,1340.94 1332.14,1341.51 1332.71,1341.51
  region: 1259.7,1393.42 1260.27,1393.42 1260.27,1392.85 1260.84,1392.85 1260.84,1392.28 1261.41,1392.28 1261.41,1391.7 1261.98,1391.7 1261.98,1391.13 1261.41,1391.13 1261.41,1391.7 1260.84,1391.7 1260.84,1392.28 1260.27,1392.28 1260.27,1392.85 1259.7,1392.85 1259.7,1393.42 1259.13,1393.42 1259.13,1393.99 1259.7,1393.99
  region: 1260.84,1200.61 1261.41,1200.61 1261.41,1200.04 1261.98,1200.04 1261.98,1199.47 1261.41,1199.47 1261.41,1200.04 1260.84,1200.04 1260.84,1200.61 1260.27,1200.61 1260.27,1201.18 1260.84,1201.18
  region: 1195.81,1263.36 1196.38,1263.36 1196.38,1262.79 1196.95,1262.79 1196.95,1262.22 1196.38,1262.22 1196.38,1262.79 1195.81,1262.79 1195.81,1263.36 1195.24,1263.36 1195.24,1263.93 1195.81,1263.93
  region: 1260.84,1250.81 1261.41,1250.81 1261.41,1250.24 1261.98,1250.24 1261.98,1249.67 1261.41,1249.67 1261.41,1250.24 1260.84,1250.24 1260.84,1250.81 1260.27,1250.81 1260.27,1251.38 1260.84,1251.38
  region: 1339.56,1334.09 1340.13,1334.09 1340.13,1333.52 1340.7,1333.52 1340.7,1332.95 1340.13,1332.95 1340.13,1333.52 1339.56,1333.52 1339.56,1334.09 1338.99,1334.09 1338.99,1334.66 1339.56,1334.66
  region: 1264.26,1247.39 1264.83,1247.39 1264.83,1246.82 1265.4,1246.82 1265.4,1246.25 1264.83,1246.25 1264.83,1246.82 1264.26,1246.82 1264.26,1247.39 1263.69,1247.39 1263.69,1247.96 1264.26,1247.96
  region: 1353.25,1400.26 1353.82,1400.26 1353.82,1399.69 1354.39,1399.69 1354.39,1399.12 1353.82,1399.12 1353.82,1399.69 1353.25,1399.69 1353.25,1400.26 1352.68,1400.26 1352.68,1400.83 1353.25,1400.83
  region: 1260.84,1324.96 1261.41,1324.96 1261.41,1324.39 1261.98,1324.39 1261.98,1323.82 1261.41,1323.82 1261.41,1324.39 1260.84,1324.39 1260.84,1324.96 1260.27,1324.96 1260.27,1325.54 1260.84,1325.54
  region: 1216.34,1418.51 1216.92,1418.51 1216.92,1417.94 1217.49,1417.94 1217.49,1417.37 1216.92,1417.37 1216.92,1417.94 1216.34,1417.94 1216.34,1418.51 1215.77,1418.51 1215.77,1419.09 1216.34,1419.09
  region: 1300.77,1372.88 1301.34,1372.88 1301.34,1372.31 1301.91,1372.31 1301.91,1371.74 1301.34,1371.74 1301.34,1372.31 1300.77,1372.31 1300.77,1372.88 1300.2,1372.88 1300.2,1373.45 1300.77,1373.45
  region: 1271.11,1379.73 1271.68,1379.73 1271.68,1379.16 1272.25,1379.16 1272.25,1378.58 1271.68,1378.58 1271.68,1379.16 1271.11,1379.16 1271.11,1379.73 1270.54,1379.73 1270.54,1380.3 1271.11,1380.3
  region: 1314.46,1340.94 1315.03,1340.94 1315.03,1340.37 1315.6,1340.37 1315.6,1339.8 1315.03,1339.8 1315.03,1340.37 1314.46,1340.37 1314.46,1340.94 1313.89,1340.94 1313.89,1341.51 1314.46,1341.51
  region: 1188.96,1278.19 1189.53,1278.19 1189.53,1277.62 1190.11,1277.62 1190.11,1277.05 1189.53,1277.05 1189.53,1277.62 1188.96,1277.62 1188.96,1278.19 1188.39,1278.19 1188.39,1278.76 1188.96,1278.76
  region: 1195.81,1411.67 1196.38,1411.67 1196.38,1411.1 1196.95,1411.1 1196.95,1410.53 1196.38,1410.53 1196.38,1411.1 1195.81,1411.1 1195.81,1411.67 1195.24,1411.67 1195.24,1412.24 1195.81,1412.24
  region: 1356.67,1387.71 1357.24,1387.71 1357.24,1387.14 1357.81,1387.14 1357.81,1386.57 1357.24,1386.57 1357.24,1387.14 1356.67,1387.14 1356.67,1387.71 1356.1,1387.71 1356.1,1388.28 1356.67,1388.28
  region: 1267.68,1240.54 1268.25,1240.54 1268.25,1239.97 1268.82,1239.97 1268.82,1239.4 1268.25,1239.4 1268.25,1239.97 1267.68,1239.97 1267.68,1240.54 1267.11,1240.54 1267.11,1241.11 1267.68,1241.11
  region: 1336.13,1404.82 1336.7,1404.82 1336.7,1404.25 1337.28,1404.25 1337.28,1403.68 1336.7,1403.68 1336.7,1404.25 1336.13,1404.25 1336.13,1404.82 1335.56,1404.82 1335.56,1405.39 1336.13,1405.39
  region: 1307.61,1354.63 1308.18,1354.63 1308.18,1354.06 1308.75,1354.06 1308.75,1353.49 1308.18,1353.49 1308.18,1354.06 1307.61,1354.06 1307.61,1354.63 1307.04,1354.63 1307.04,1355.2 1307.61,1355.2
  region: 1336.13,1337.51 1336.7,1337.51 1336.7,1336.94 1337.28,1336.94 1337.28,1336.37 1336.7,1336.37 1336.7,1336.94 1336.13,1336.94 1336.13,1337.51 1335.56,1337.51 1335.56,1338.08 1336.13,1338.08
Multi-Layer:
  pour cut-out: 3675,1550 4700,1550 4700,1600 5120,1600 5120,760 4700,760 4700,810 4695,815 3675,815

## Silkscreen, mask and mechanical layers (free items; w line width, h text height)
Top Overlay:
  region: 9337 vertices and 315 holes, not listed, extent 1126.79,1196.05 1361.23,1425.93
  text "BMS Slave Device" at 1170,1120 h30
  text "Revision 2.0" at 1170,1065 h25
  text "GND" at 2365,245 h30
  text "DTEN" at 2475,245 h30
  text "5V" at 2615,245 h30

## Text inside footprints (layer, text, board x,y; h text height)
D2: Top Overlay "+" at 1066.61,563.94 h60 r90
D2: Top Overlay "+" at 2453.22,568 h60 r90
D2: Top Overlay "+" at 3838.22,569.54 h60 r90
D2: Top Overlay "+" at 5048.22,568 h60 r90
D2: Top Overlay "+" at 931.78,1787 h60 r270
D2: Top Overlay "+" at 2313.78,1787 h60 r270
D2: Top Overlay "+" at 3707.72,1787 h60 r270
D2: Top Overlay "+" at 241.78,1787 h60 r270
D2: Top Overlay "+" at 1758.22,563 h60 r90
D2: Top Overlay "+" at 3143.22,568 h60 r90
D2: Top Overlay "+" at 4528.22,568 h60 r90
D2: Top Overlay "+" at 1621.78,1791 h60 r270
D2: Top Overlay "+" at 3011.78,1790 h60 r270
D2: Top Overlay "+" at 4392.72,1787 h60 r270
WTD: Top Overlay "+" at 2602,547.39 h60 r180